# Altium PCB bob_breakout-layout.PcbDoc (part 1 of 2)
Units mil, origin at the board's own origin, x right, y up, seen from the top; angles counter-clockwise.
Board outline 5510 x 3935 mil, 2 copper layers (Top Layer, Bottom Layer); 95 components, 85 nets, 372 pads, 74 vias.
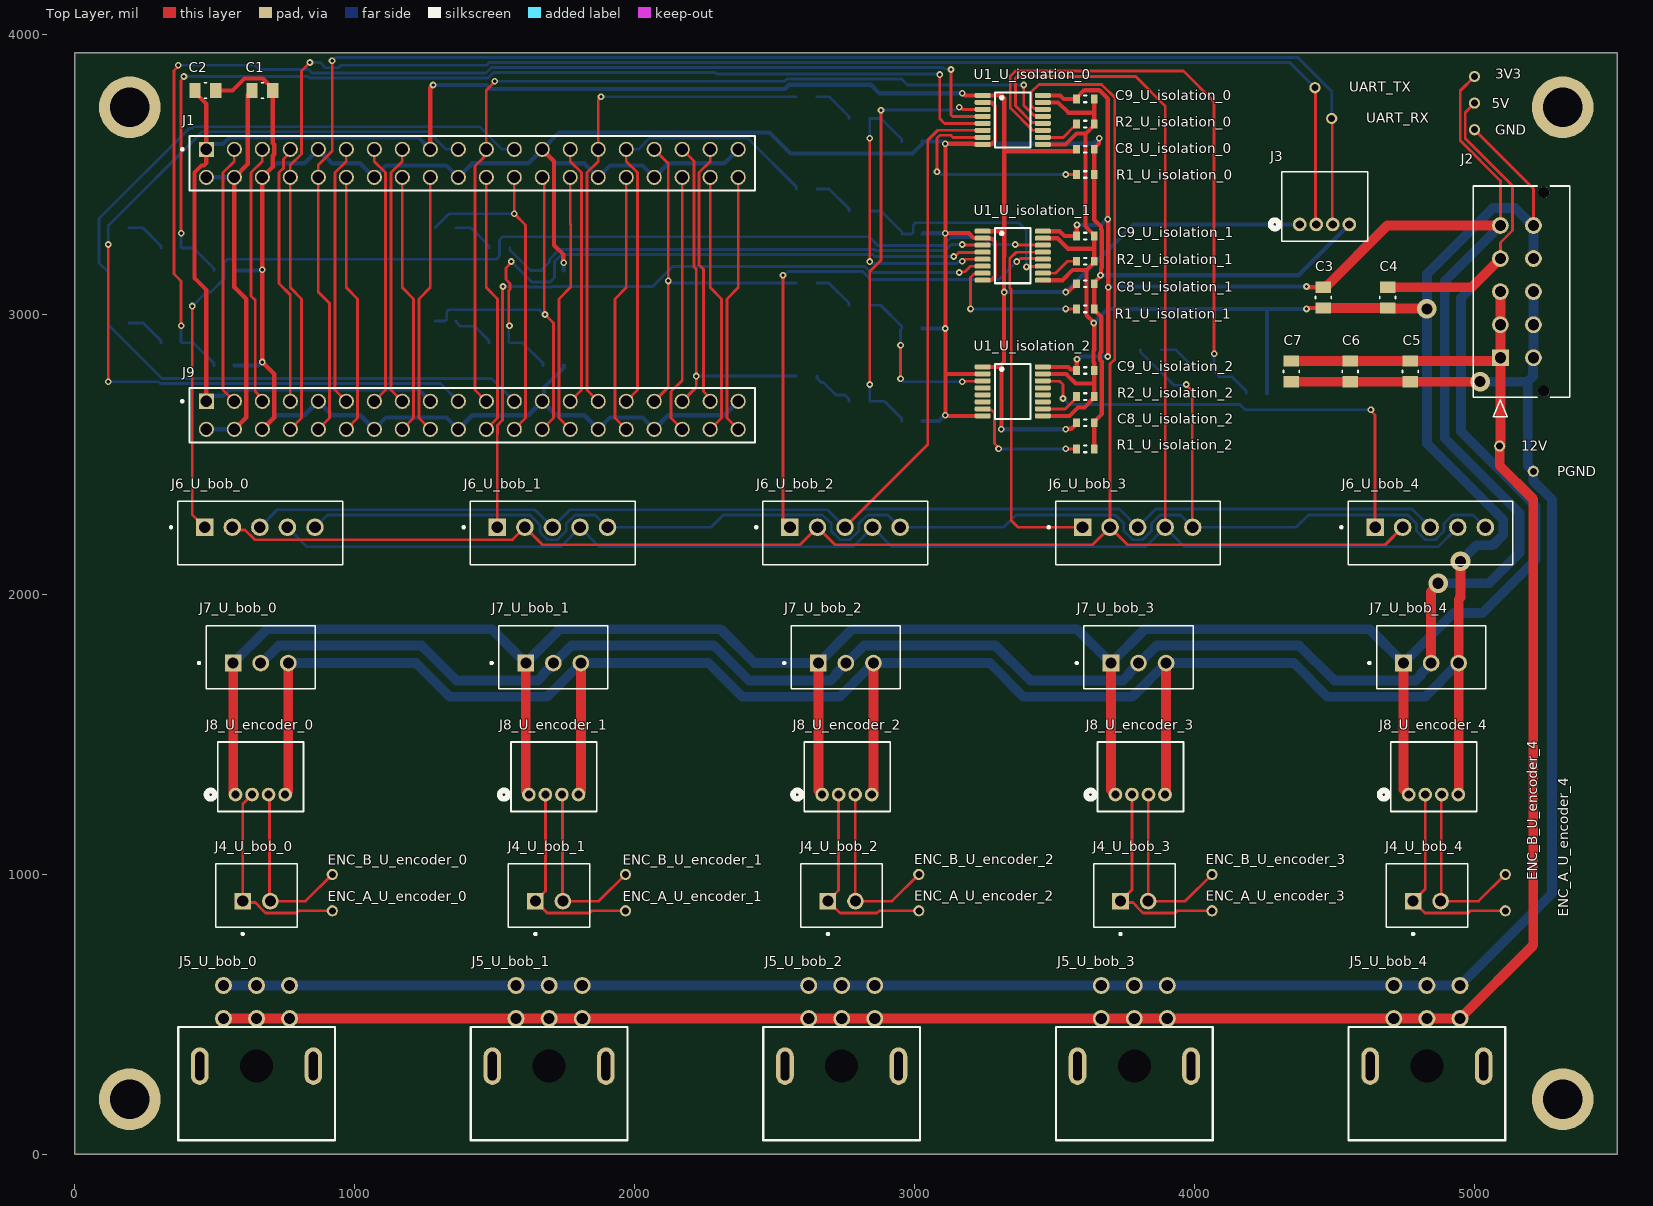
[diagram p0: Top Layer view]
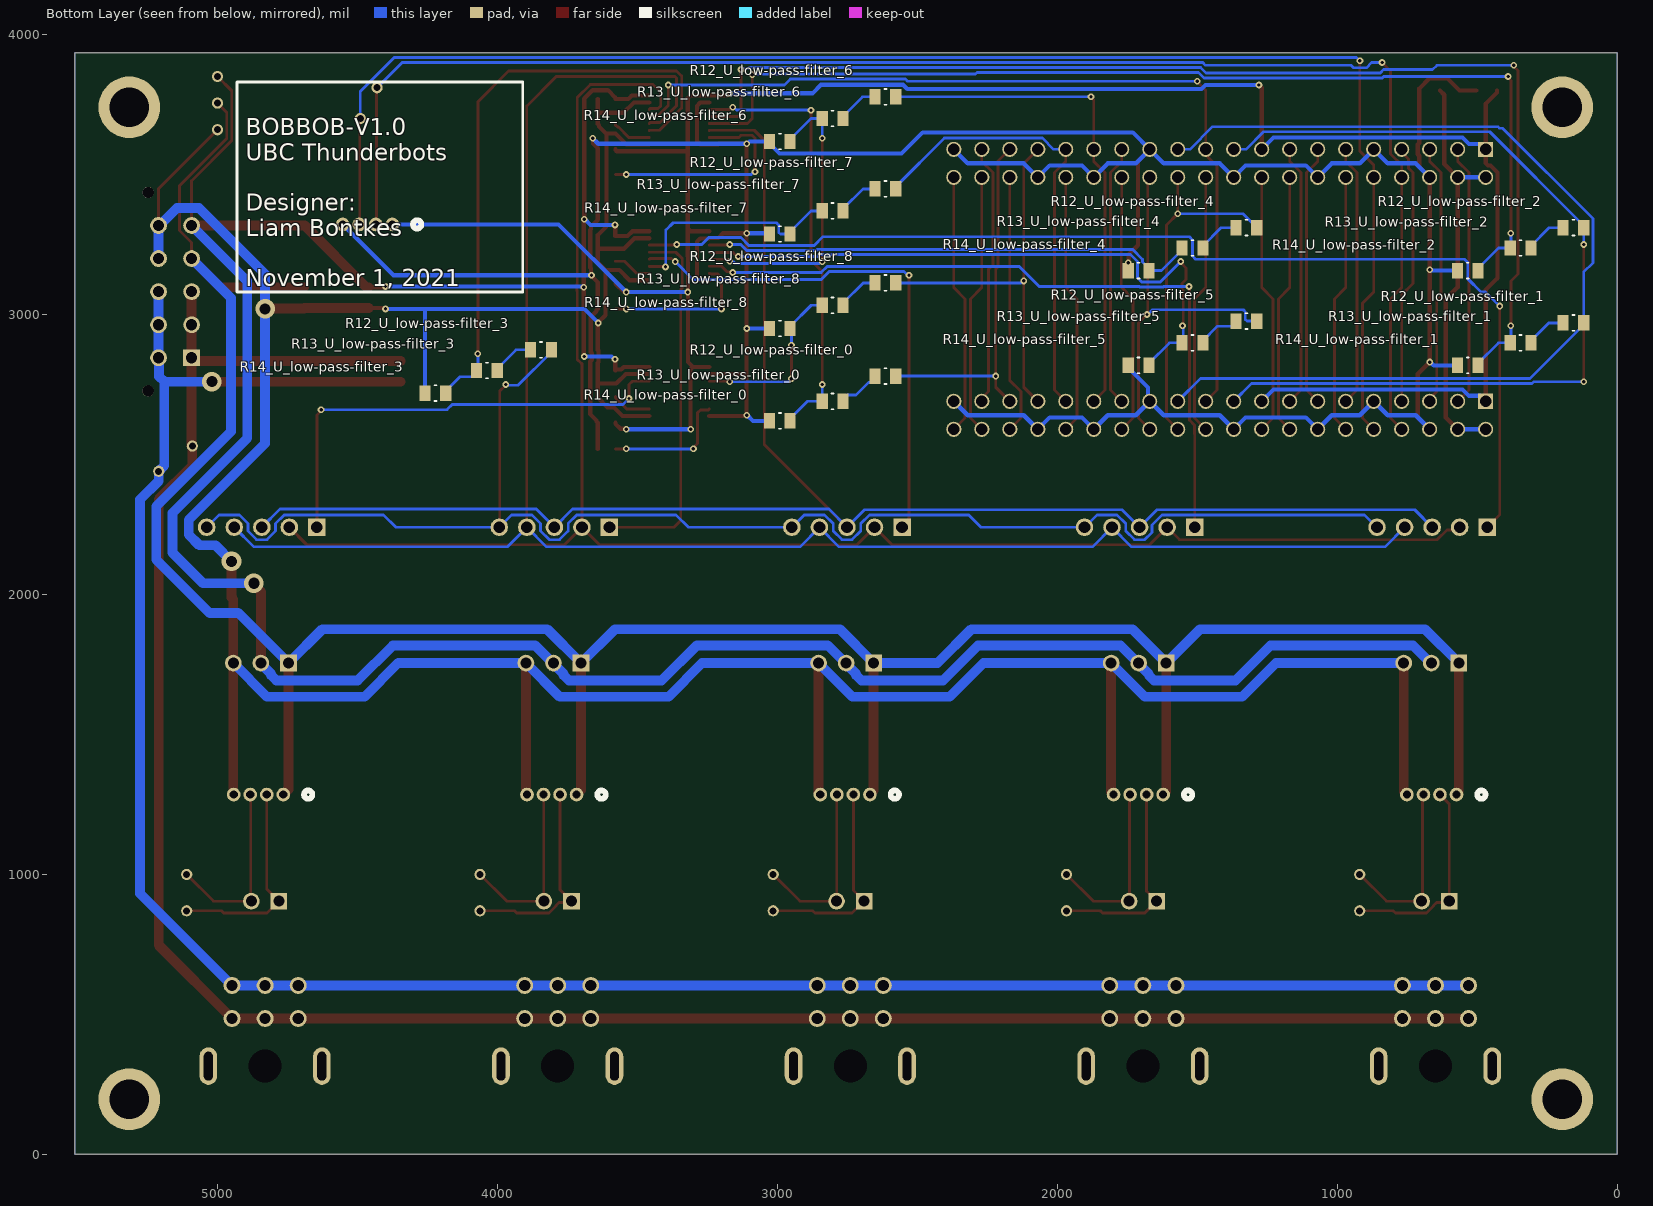
[diagram p1: Bottom Layer view, seen from below]

## Layer stack, top to bottom
Top Solder: solder mask 0.4, Solder Resist, Dk 3.5
Top Layer: signal copper 1.4
Dielectric 1: dielectric 12.6, FR-4, Dk 4.8
Bottom Layer: signal copper 1.4
Bottom Solder: solder mask 0.4, Solder Resist, Dk 3.5

## Board outline
0,0 5510,0 5510,3935 0,3935

## Design rules (kind name [scope] priority, off if disabled: settings)
BoardOutlineClearance [All] p1: gap=7.87 ignorepadtopadclearanceinfootprint=FALSE except(15.75: Arc-SplitBarrior Arc-SplitContinuation Track-SplitBarrior Track-SplitContinuation SMDPad-SplitBarrior SMDPad-SplitContinuation THPad-SplitBarrior THPad-SplitContinuation Via-SplitBarrior Via-SplitContinuation Fill-SplitBarrior Fill-SplitContinuation Poly-SplitBarrior Poly-SplitContinuation Region-SplitBarrior Region-SplitContinuation Text-SplitBarrior Text-SplitContinuation)
Clearance "Clearance Bottom Layer" [OnLayer('Bottom Layer')] p1: gap=8 ignorepadtopadclearanceinfootprint=TRUE except(10: Arc-Text Track-Text SMDPad-Text THPad-Text Via-Text Fill-Text Poly-Text Region-Text Text-Text)
Clearance "Clearance Top Layer" [OnLayer('Top Layer')] p2: gap=8 ignorepadtopadclearanceinfootprint=TRUE except(10: Arc-Text Track-Text SMDPad-Text THPad-Text Via-Text Fill-Text Poly-Text Region-Text Text-Text)
Clearance [All] p3: gap=7.87 ignorepadtopadclearanceinfootprint=TRUE except(3.5: Arc-Arc Arc-Track Arc-SMDPad Track-Track Track-SMDPad SMDPad-SMDPad; 5: Arc-Via Track-Via SMDPad-Via THPad-Via Via-Via; 10: Arc-Text Track-Text SMDPad-Text THPad-Text Via-Text Fill-Text Poly-Text Region-Text Text-Text)
HoleSize [All] p1: absolutevalues=TRUE maxlimit=248.03 minlimit=7.87 maxpercent=80.000 minpercent=20.000
MinimumAnnularRing [All] p1: minimumring=3
MinimumSolderMaskSliver [All] p1: minsoldermaskwidth=3.94
PolygonConnect PolygonConnect_1 [All] p1: thpad.connectstyle=Relief thpad.reliefconductorwidth=20 thpad.reliefentries=4 thpad.polygonreliefangle="90 Angle" thpad.airgapwidth=10 smdpad.connectstyle=Relief smdpad.reliefconductorwidth=20 smdpad.reliefentries=4 smdpad.polygonreliefangle="90 Angle" smdpad.airgapwidth=10 via.connectstyle=Direct via.reliefconductorwidth=20 via.reliefentries=4 via.polygonreliefangle="90 Angle" via.airgapwidth=10
RoomDefinition U_low-pass-filter_8 [InComponentClass('U_low-pass-filter_8')] p1: confinementstyle=ConfineIn formatcopy=TRUE lockcomponents=FALSE outline 2530,2900 3070,2900 3070,3170 2530,3170
RoomDefinition U_low-pass-filter_7 [InComponentClass('U_low-pass-filter_7')] p2: confinementstyle=ConfineIn formatcopy=TRUE lockcomponents=FALSE outline 2530,3240 3070,3240 3070,3500 2530,3500
RoomDefinition U_low-pass-filter_6 [InComponentClass('U_low-pass-filter_6')] p3: confinementstyle=ConfineIn formatcopy=TRUE lockcomponents=FALSE outline 2530,3570 3070,3570 3070,3830 2530,3830
RoomDefinition U_low-pass-filter_5 [InComponentClass('U_low-pass-filter_5')] p4: confinementstyle=ConfineIn formatcopy=TRUE lockcomponents=FALSE outline 1240,2770 1790,2770 1790,3030 1240,3030
RoomDefinition U_low-pass-filter_4 [InComponentClass('U_low-pass-filter_4')] p5: confinementstyle=ConfineIn formatcopy=TRUE lockcomponents=FALSE outline 1240,3100 1790,3100 1790,3360 1240,3360
RoomDefinition U_low-pass-filter_3 [InComponentClass('U_low-pass-filter_3')] p6: confinementstyle=ConfineIn formatcopy=TRUE lockcomponents=FALSE outline 3760,2670 4300,2670 4300,2930 3760,2930
RoomDefinition U_low-pass-filter_2 [InComponentClass('U_low-pass-filter_2')] p7: confinementstyle=ConfineIn formatcopy=TRUE lockcomponents=FALSE outline 70,3100 620,3100 620,3360 70,3360
RoomDefinition U_low-pass-filter_1 [InComponentClass('U_low-pass-filter_1')] p8: confinementstyle=ConfineIn formatcopy=TRUE lockcomponents=FALSE outline 70,2770 620,2770 620,3020 70,3020
RoomDefinition U_low-pass-filter_0 [InComponentClass('U_low-pass-filter_0')] p9: confinementstyle=ConfineIn formatcopy=TRUE lockcomponents=FALSE outline 2530,2570 3070,2570 3070,2830 2530,2830
RoomDefinition U_isolation_0 [InComponentClass('U_isolation_0')] p10: confinementstyle=ConfineIn formatcopy=TRUE lockcomponents=FALSE outline 3190,3460 3670,3460 3670,3820 3190,3820
RoomDefinition U_ui [InComponentClass('U_ui')] p11: confinementstyle=ConfineIn formatcopy=TRUE lockcomponents=FALSE outline 366.5,2521.73 366.5,2758.27 2450.87,2758.27 2450.87,2521.73
RoomDefinition U_power [InComponentClass('U_power')] p12: confinementstyle=ConfineIn formatcopy=TRUE lockcomponents=FALSE outline 4250,2400 5410,2400 5410,3890 4250,3890
RoomDefinition U_jetson-nano [InComponentClass('U_jetson-nano')] p13: confinementstyle=ConfineIn formatcopy=TRUE lockcomponents=FALSE outline 360,3420 2460,3420 2460,3850 360,3850
RoomDefinition U_isolation_2 [InComponentClass('U_isolation_2')] p14: confinementstyle=ConfineIn formatcopy=TRUE lockcomponents=FALSE outline 3190,2480 3670,2480 3670,2850 3190,2850
RoomDefinition U_isolation_1 [InComponentClass('U_isolation_1')] p15: confinementstyle=ConfineIn formatcopy=TRUE lockcomponents=FALSE outline 3190,2980 3670,2980 3670,3340 3190,3340
RoomDefinition U_encoder_4 [InComponentClass('U_encoder_4')] p16: confinementstyle=ConfineIn formatcopy=TRUE lockcomponents=FALSE outline 4640,830 5150,830 5150,1500 4640,1500
RoomDefinition U_encoder_3 [InComponentClass('U_encoder_3')] p17: confinementstyle=ConfineIn formatcopy=TRUE lockcomponents=FALSE outline 3590,830 4100,830 4100,1500 3590,1500
RoomDefinition U_encoder_2 [InComponentClass('U_encoder_2')] p18: confinementstyle=ConfineIn formatcopy=TRUE lockcomponents=FALSE outline 2540,830 3050,830 3050,1500 2540,1500
RoomDefinition U_encoder_1 [InComponentClass('U_encoder_1')] p19: confinementstyle=ConfineIn formatcopy=TRUE lockcomponents=FALSE outline 1490,830 2010,830 2010,1500 1490,1500
RoomDefinition U_encoder_0 [InComponentClass('U_encoder_0')] p20: confinementstyle=ConfineIn formatcopy=TRUE lockcomponents=FALSE outline 450,830 960,830 960,1500 450,1500
RoomDefinition U_bob_4 [InComponentClass('U_bob_4')] p21: confinementstyle=ConfineIn formatcopy=TRUE lockcomponents=FALSE outline 4500,30 5160,30 5160,2360 4500,2360
RoomDefinition U_bob_3 [InComponentClass('U_bob_3')] p22: confinementstyle=ConfineIn formatcopy=TRUE lockcomponents=FALSE outline 3460,30 4120,30 4120,2360 3460,2360
RoomDefinition U_bob_2 [InComponentClass('U_bob_2')] p23: confinementstyle=ConfineIn formatcopy=TRUE lockcomponents=FALSE outline 2410,30 3070,30 3070,2360 2410,2360
RoomDefinition U_bob_1 [InComponentClass('U_bob_1')] p24: confinementstyle=ConfineIn formatcopy=TRUE lockcomponents=FALSE outline 1370,30 2030,30 2030,2360 1370,2360
RoomDefinition U_bob_0 [InComponentClass('U_bob_0')] p25: confinementstyle=ConfineIn formatcopy=TRUE lockcomponents=FALSE outline 320,30 980,30 980,2360 320,2360
RoutingCorners [All] p1: cornerstyle=Round minsetback=100 maxsetback=100
RoutingVias [All] p1: holewidth=19.68 width=39.37 viastyle="Through Hole" minholewidth=7.87 minwidth=17.72 maxholewidth=39.37 maxwidth=78.74
SilkToSilkClearance [All] p1: silktosilkclearance=3.94
SilkToSolderMaskClearance [IsPad] p1: minsilkscreentomaskgap=3.94 clearancetoexposedcopper=TRUE
SolderMaskExpansion [All] p1: expansion=4 istentingtop=FALSE
Width [All] p1: maxlimit=100 minlimit=3.5 preferedwidth=15
25 further rules are at their usual default settings.

## Classes and differential pairs
channel class low-pass-filter: U_low-pass-filter_0 U_low-pass-filter_1 U_low-pass-filter_2 U_low-pass-filter_3 U_low-pass-filter_4 U_low-pass-filter_5 U_low-pass-filter_6 U_low-pass-filter_7 U_low-pass-filter_8
component class U_low-pass-filter_8: R12_U_low-pass-filter_8 R13_U_low-pass-filter_8 R14_U_low-pass-filter_8
component class U_low-pass-filter_7: R12_U_low-pass-filter_7 R13_U_low-pass-filter_7 R14_U_low-pass-filter_7
component class U_low-pass-filter_6: R12_U_low-pass-filter_6 R13_U_low-pass-filter_6 R14_U_low-pass-filter_6
component class U_low-pass-filter_5: R12_U_low-pass-filter_5 R13_U_low-pass-filter_5 R14_U_low-pass-filter_5
component class U_low-pass-filter_4: R12_U_low-pass-filter_4 R13_U_low-pass-filter_4 R14_U_low-pass-filter_4
component class U_low-pass-filter_3: R12_U_low-pass-filter_3 R13_U_low-pass-filter_3 R14_U_low-pass-filter_3
component class U_low-pass-filter_2: R12_U_low-pass-filter_2 R13_U_low-pass-filter_2 R14_U_low-pass-filter_2
component class U_low-pass-filter_1: R12_U_low-pass-filter_1 R13_U_low-pass-filter_1 R14_U_low-pass-filter_1
component class U_low-pass-filter_0: R12_U_low-pass-filter_0 R13_U_low-pass-filter_0 R14_U_low-pass-filter_0
component class U_isolation_2: C8_U_isolation_2 C9_U_isolation_2 R1_U_isolation_2 R2_U_isolation_2 U1_U_isolation_2
component class U_isolation_1: C8_U_isolation_1 C9_U_isolation_1 R1_U_isolation_1 R2_U_isolation_1 U1_U_isolation_1
component class U_isolation_0: C8_U_isolation_0 C9_U_isolation_0 R1_U_isolation_0 R2_U_isolation_0 U1_U_isolation_0
component class U_encoder_4: ENC_A_U_encoder_4 ENC_B_U_encoder_4 J8_U_encoder_4
component class U_bob_0: J4_U_bob_0 J5_U_bob_0 J6_U_bob_0 J7_U_bob_0
channel class isolation: U_isolation1 U_isolation2 U_isolation3
channel class encoder: U_encoder1 U_encoder_0 U_encoder_1 U_encoder_2 U_encoder_3
channel class bob: U_bob5 U_bob_1 U_bob_2 U_bob_3 U_bob_4
component class U_ui: J9
component class U_power: 3V3 5V 12V C3 C4 C5 C6 C7 GND J2 J3 PGND UART_RX UART_TX
component class U_jetson-nano: C1 C2 J1
component class U_encoder_0: ENC_A_U_encoder_0 ENC_B_U_encoder_0 J8_U_encoder_0
component class U_encoder_1: ENC_A_U_encoder_1 ENC_B_U_encoder_1 J8_U_encoder_1
component class U_encoder_2: ENC_A_U_encoder_2 ENC_B_U_encoder_2 J8_U_encoder_2
component class U_encoder_3: ENC_A_U_encoder_3 ENC_B_U_encoder_3 J8_U_encoder_3
component class U_bob_1: J4_U_bob_1 J5_U_bob_1 J6_U_bob_1 J7_U_bob_1
component class U_bob_2: J4_U_bob_2 J5_U_bob_2 J6_U_bob_2 J7_U_bob_2
component class U_bob_3: J4_U_bob_3 J5_U_bob_3 J6_U_bob_3 J7_U_bob_3
component class U_bob_4: J4_U_bob_4 J5_U_bob_4 J6_U_bob_4 J7_U_bob_4

## Components (designator, comment, footprint, x,y, rotation, side; value= is the part's Value field where it differs from the comment)
3V3 "Test Point (Via)" TP 5000,3850 r90 top
5V "Test Point (Via)" TP 5000,3755 r90 top
12V "Test Point (Via)" TP 5090,2530 r90 top
C1 "0.1uF 25V" 0805 670,3800 r0 top value=0.1uF
C2 "0.1uF 25V" 0805 467,3800 r0 top value=0.1uF
C3 "0.1uF 25V" 0805 4460,3060 r270 top value=0.1uF
C4 "0.1uF 25V" 0805 4690,3060 r270 top value=0.1uF
C5 "0.1uF 25V" 0805 4770.63,2796.74 r270 top value=0.1uF
C6 "0.1uF 25V" 0805 4555.63,2796.74 r270 top value=0.1uF
C7 "0.1uF 25V" 0805 4345.63,2796.74 r270 top value=0.1uF
C8_U_isolation_0 "0.10uF" 0603 3610,3590 r180 top (schematic designator C8)
C8_U_isolation_1 "0.10uF" 0603 3610,3110 r180 top (schematic designator C8)
C8_U_isolation_2 "0.10uF" 0603 3610,2613.33 r180 top (schematic designator C8)
C9_U_isolation_0 "0.10uF" 0603 3610,3770 r180 top (schematic designator C9)
C9_U_isolation_1 "0.10uF" 0603 3610,3280 r180 top (schematic designator C9)
C9_U_isolation_2 "0.10uF" 0603 3610,2800 r180 top (schematic designator C9)
ENC_A_U_encoder_0 "Test Point (Via)" TP 920,870 r90 top (schematic designator ENC_A)
ENC_A_U_encoder_1 "Test Point (Via)" TP 1967.5,870 r90 top (schematic designator ENC_A)
ENC_A_U_encoder_2 "Test Point (Via)" TP 3015,870 r90 top (schematic designator ENC_A)
ENC_A_U_encoder_3 "Test Point (Via)" TP 4062.5,870 r90 top (schematic designator ENC_A)
ENC_A_U_encoder_4 "Test Point (Via)" TP 5110,870 r90 top (schematic designator ENC_A)
ENC_B_U_encoder_0 "Test Point (Via)" TP 920,1000 r90 top (schematic designator ENC_B)
ENC_B_U_encoder_1 "Test Point (Via)" TP 1967.5,1000 r90 top (schematic designator ENC_B)
ENC_B_U_encoder_2 "Test Point (Via)" TP 3015,1000 r90 top (schematic designator ENC_B)
ENC_B_U_encoder_3 "Test Point (Via)" TP 4062.5,1000 r90 top (schematic designator ENC_B)
ENC_B_U_encoder_4 "Test Point (Via)" TP 5110,1000 r90 top (schematic designator ENC_B)
GND "Test Point (Via)" TP 5000,3660 r90 top
J1 "CN HDR 40POS TH" SAMTEC_SSQ-120-22-G-D 1420,3540 r180 top
J2 "8A Molex" MOLEX_0430451012 5092.52,2845.52 r270 top
J3 "S4B-ZR(LF)(SN)" "CN S4B-ZR(LF)(SN)_JST" 4375.63,3321.74 r180 top
J4_U_bob_0 "CN HDR 2POS JST XH" JST_B2B-XH-A(LF)(SN) 649.37,925 r0 top (schematic designator J4)
J4_U_bob_1 "CN HDR 2POS JST XH" JST_B2B-XH-A(LF)(SN) 1694.53,925 r0 top (schematic designator J4)
J4_U_bob_2 "CN HDR 2POS JST XH" JST_B2B-XH-A(LF)(SN) 2739.68,925 r0 top (schematic designator J4)
J4_U_bob_3 "CN HDR 2POS JST XH" JST_B2B-XH-A(LF)(SN) 3784.84,925 r0 top (schematic designator J4)
J4_U_bob_4 "CN HDR 2POS JST XH" JST_B2B-XH-A(LF)(SN) 4830,925 r0 top (schematic designator J4)
J5_U_bob_0 "CN HDR 6POS Molex 43045-0622 (R)" 430450622 649.37,315 r0 top (schematic designator J5)
J5_U_bob_1 "CN HDR 6POS Molex 43045-0622 (R)" 430450622 1694.53,315 r0 top (schematic designator J5)
J5_U_bob_2 "CN HDR 6POS Molex 43045-0622 (R)" 430450622 2739.68,315 r0 top (schematic designator J5)
J5_U_bob_3 "CN HDR 6POS Molex 43045-0622 (R)" 430450622 3784.84,315 r0 top (schematic designator J5)
J5_U_bob_4 "CN HDR 6POS Molex 43045-0622 (R)" 430450622 4830,315 r0 top (schematic designator J5)
J6_U_bob_0 "CN HDR 5POS JST XH" JST_B5B-XH-A(LF)(SN) 464.37,2240 r0 top (schematic designator J6)
J6_U_bob_1 "CN HDR 5POS JST XH" JST_B5B-XH-A(LF)(SN) 1509.53,2240 r0 top (schematic designator J6)
J6_U_bob_2 "CN HDR 5POS JST XH" JST_B5B-XH-A(LF)(SN) 2554.68,2240 r0 top (schematic designator J6)
J6_U_bob_3 "CN HDR 5POS JST XH" JST_B5B-XH-A(LF)(SN) 3599.84,2240 r0 top (schematic designator J6)
J6_U_bob_4 "CN HDR 5POS JST XH" JST_B5B-XH-A(LF)(SN) 4645,2240 r0 top (schematic designator J6)
J7_U_bob_0 "B3B-XH-A(LF)(SN)" JST_B3B-XH-A(LF)(SN) 664.37,1755 r0 top (schematic designator J7)
J7_U_bob_1 "B3B-XH-A(LF)(SN)" JST_B3B-XH-A(LF)(SN) 1709.53,1755 r0 top (schematic designator J7)
J7_U_bob_2 "B3B-XH-A(LF)(SN)" JST_B3B-XH-A(LF)(SN) 2754.68,1755 r0 top (schematic designator J7)
J7_U_bob_3 "B3B-XH-A(LF)(SN)" JST_B3B-XH-A(LF)(SN) 3799.84,1755 r0 top (schematic designator J7)
J7_U_bob_4 "B3B-XH-A(LF)(SN)" JST_B3B-XH-A(LF)(SN) 4845,1755 r0 top (schematic designator J7)
J8_U_encoder_0 "S4B-ZR(LF)(SN)" "CN S4B-ZR(LF)(SN)_JST" 574.37,1285 r180 top (schematic designator J8)
J8_U_encoder_1 "S4B-ZR(LF)(SN)" "CN S4B-ZR(LF)(SN)_JST" 1622.03,1285 r180 top (schematic designator J8)
J8_U_encoder_2 "S4B-ZR(LF)(SN)" "CN S4B-ZR(LF)(SN)_JST" 2669.68,1285 r180 top (schematic designator J8)
J8_U_encoder_3 "S4B-ZR(LF)(SN)" "CN S4B-ZR(LF)(SN)_JST" 3717.34,1285 r180 top (schematic designator J8)
J8_U_encoder_4 "S4B-ZR(LF)(SN)" "CN S4B-ZR(LF)(SN)_JST" 4765,1285 r180 top (schematic designator J8)
J9 "CN HDR 40POS TH" SAMTEC_SSQ-120-22-G-D 1420,2640 r180 top
PGND "Test Point (Via)" TP 5210,2440 r90 top
R1_U_isolation_0 "4.7k" 0603 3610,3500 r0 top (schematic designator R1)
R1_U_isolation_1 "4.7k" 0603 3610,3020 r0 top (schematic designator R1)
R1_U_isolation_2 "4.7k" 0603 3610,2520 r0 top (schematic designator R1)
R2_U_isolation_0 "4.7k" 0603 3610,3680 r0 top (schematic designator R2)
R2_U_isolation_1 "4.7k" 0603 3610,3190 r0 top (schematic designator R2)
R2_U_isolation_2 "4.7k" 0603 3610,2706.67 r0 top (schematic designator R2)
R12_U_low-pass-filter_0 "22" 0805 2614.5,2780 r180 bottom (schematic designator R12)
R12_U_low-pass-filter_1 "22" 0805 157,2970 r180 bottom (schematic designator R12)
R12_U_low-pass-filter_2 "22" 0805 157,3310 r180 bottom (schematic designator R12)
R12_U_low-pass-filter_3 "22" 0805 3844.5,2873.75 r180 bottom (schematic designator R12)
R12_U_low-pass-filter_4 "22" 0805 1324.5,3310 r180 bottom (schematic designator R12)
R12_U_low-pass-filter_5 "22" 0805 1324.5,2976.25 r180 bottom (schematic designator R12)
R12_U_low-pass-filter_6 "22" 0805 2614.5,3777.5 r180 bottom (schematic designator R12)
R12_U_low-pass-filter_7 "22" 0805 2614.5,3448.75 r180 bottom (schematic designator R12)
R12_U_low-pass-filter_8 "22" 0805 2614.5,3113 r180 bottom (schematic designator R12)
R13_U_low-pass-filter_0 "JUMPER" 0805 2803,2690 r180 bottom value=0 (schematic designator R13)
R13_U_low-pass-filter_1 "JUMPER" 0805 345.5,2898.75 r180 bottom value=0 (schematic designator R13)
R13_U_low-pass-filter_2 "JUMPER" 0805 345.5,3237.5 r180 bottom value=0 (schematic designator R13)
R13_U_low-pass-filter_3 "JUMPER" 0805 4037.5,2800 r180 bottom value=0 (schematic designator R13)
R13_U_low-pass-filter_4 "JUMPER" 0805 1517.25,3237.5 r180 bottom value=0 (schematic designator R13)
R13_U_low-pass-filter_5 "JUMPER" 0805 1517.25,2898.75 r180 bottom value=0 (schematic designator R13)
R13_U_low-pass-filter_6 "JUMPER" 0805 2803,3700 r180 bottom value=0 (schematic designator R13)
R13_U_low-pass-filter_7 "JUMPER" 0805 2803,3370 r180 bottom value=0 (schematic designator R13)
R13_U_low-pass-filter_8 "JUMPER" 0805 2803,3033 r180 bottom value=0 (schematic designator R13)
R14_U_low-pass-filter_0 "JUMPER" 0805 2991.5,2620 r0 bottom value=0 (schematic designator R14)
R14_U_low-pass-filter_1 "JUMPER" 0805 534,2818.12 r0 bottom value=0 (schematic designator R14)
R14_U_low-pass-filter_2 "JUMPER" 0805 534,3156.75 r0 bottom value=0 (schematic designator R14)
R14_U_low-pass-filter_3 "JUMPER" 0805 4221.5,2718.88 r0 bottom value=0 (schematic designator R14)
R14_U_low-pass-filter_4 "JUMPER" 0805 1710,3156.75 r0 bottom value=0 (schematic designator R14)
R14_U_low-pass-filter_5 "JUMPER" 0805 1710,2818.12 r0 bottom value=0 (schematic designator R14)
R14_U_low-pass-filter_6 "JUMPER" 0805 2991.5,3617.75 r0 bottom value=0 (schematic designator R14)
R14_U_low-pass-filter_7 "JUMPER" 0805 2991.5,3287.38 r0 bottom value=0 (schematic designator R14)
R14_U_low-pass-filter_8 "JUMPER" 0805 2991.5,2950 r0 bottom value=0 (schematic designator R14)
U1_U_isolation_0 "ADUM141D1BRQZ" SOP64P600X175-16N 3350.63,3695 r0 top (schematic designator U1)
U1_U_isolation_1 "ADUM141D1BRQZ" SOP64P600X175-16N 3350.63,3210 r0 top (schematic designator U1)
U1_U_isolation_2 "ADUM141D1BRQZ" SOP64P600X175-16N 3350.63,2725 r0 top (schematic designator U1)
UART_RX "Test Point (Via)" TP 4490,3700 r90 top
UART_TX "Test Point (Via)" TP 4430,3810 r180 top

## Footprints (in the part's own frame and the unit in brackets; to place one, negate y for a bottom-side part, rotate by r counter-clockwise, add the part's x,y. Pads: shape width x height; smd on the part's side, far side on the other; paste and mask are expansions set on the pad)
0603 [mm] "Chip Resistor, 2-Leads, Body 1.60x0.80mm, IPC High Density"
  rect 0.6x0.8 smd: 1(-0.8,0) 2(0.8,0)
  silkscreen extent -0.1,-0.3 0.1,0.3, body extent -0.8,-0.4 0.8,0.4, height 0.6
0805 [mil]
  rect 40x55 smd: 1(-37,0) 2(37,0)
  silkscreen extent -4,-28 4,28, body extent -47,-28 47,28, height 24
430450622 [mm] "6 POS RA MOLEX"
  round 1.53 hole 1.02: 1(3,4.32) 2(0,4.32) 3(-3,4.32) 4(3,7.32) 5(0,7.32) 6(-3,7.32)
  round 0 hole 3: MH(0,0)
  oval 1.6x3.4 hole 0.8 slot 2.6 at 90 deg: MH1(5.15,0) MH2(-5.15,0)
  silkscreen extent -7.11,-6.71 7.11,3.56, body extent -6.62,-4.65 6.58,7.59, height 3.12
"CN S4B-ZR(LF)(SN)_JST" [mil]
  round 49 hole 29 mask+0: 1(0,0) 2(-59.06,0) 3(-118.11,0) 4(-177.17,0)
  silkscreen extent -243,-188 104,60, body extent 0,0 10,10, height 10
JST_B2B-XH-A(LF)(SN) [mm]
  rect 1.508x1.508 hole 1: 1(-1.25,-0.525)
  round 1.508 hole 1: 2(1.25,-0.525)
  silkscreen extent -3.7,-3.6 3.7,2.88, body extent -3.7,-2.85 3.7,2.9, height 7.1
JST_B3B-XH-A(LF)(SN) [mm]
  rect 1.508x1.508 hole 1: 1(-2.5,0)
  round 1.508 hole 1: 2(0,0) 3(2.5,0)
  silkscreen extent -5.7,-2.35 4.95,3.4, body extent -4.96,-2.35 4.94,3.4, height 7
JST_B5B-XH-A(LF)(SN) [mm]
  rect 1.59x1.59 hole 1.06: 1(0,0)
  round 1.59 hole 1.06: 2(2.5,0) 3(5,0) 4(7.5,0) 5(10,0)
  silkscreen extent -3.16,-3.4 12.5,2.35
MOLEX_0430451012 [mm]
  rect 1.52x1.52 hole 1.02 mask+0.076: 1(0,0)
  round 1.52 hole 1.02 mask+0.076: 2(-3,0) 3(-6,0) 4(-9,0) 5(-12,0) 6(0,3) 7(-3,3) 8(-6,3) 9(-9,3) 10(-12,3)
  round 1.02 hole 1.02 unplated mask+0.076: M1(3,3.94) M2(-15,3.94)
  silkscreen extent -15.57,-2.47 5.35,6.3, body extent -15.57,-2.47 3.58,6.3, height 9.95
SAMTEC_SSQ-120-22-G-D [mm]
  rect 1.37x1.37 hole 1.02: 01(24.13,-1.27)
  round 1.37 hole 1.02: 02(24.13,1.27) 03(21.59,-1.27) 04(21.59,1.27) 05(19.05,-1.27) 06(19.05,1.27) 07(16.51,-1.27) 08(16.51,1.27) 09(13.97,-1.27) 10(13.97,1.27) 11(11.43,-1.27) 12(11.43,1.27) 13(8.89,-1.27) 14(8.89,1.27) 15(6.35,-1.27) 16(6.35,1.27) 17(3.81,-1.27) 18(3.81,1.27) 19(1.27,-1.27) 20(1.27,1.27) 21(-1.27,-1.27) 22(-1.27,1.27) 23(-3.81,-1.27) 24(-3.81,1.27) 25(-6.35,-1.27) 26(-6.35,1.27) 27(-8.89,-1.27) 28(-8.89,1.27) 29(-11.43,-1.27) 30(-11.43,1.27) 31(-13.97,-1.27) 32(-13.97,1.27) 33(-16.51,-1.27) 34(-16.51,1.27) 35(-19.05,-1.27) 36(-19.05,1.27) 37(-21.59,-1.27) 38(-21.59,1.27) 39(-24.13,-1.27) 40(-24.13,1.27)
  silkscreen extent -25.66,-2.47 26.4,2.47
SOP64P600X175-16N [mm] "SOP, 16-Leads, Body 4.90x3.91mm, Pitch 0.64mm, IPC Medium Density"
  rrect50% 1.45x0.45 smd mask+0.08: 1(-2.725,2.222) 2(-2.725,1.587) 3(-2.725,0.953) 4(-2.725,0.318) 5(-2.725,-0.318) 6(-2.725,-0.953) 7(-2.725,-1.587) 8(-2.725,-2.222) 9(2.725,-2.222) 10(2.725,-1.587) 11(2.725,-0.953) 12(2.725,-0.318) 13(2.725,0.318) 14(2.725,0.953) 15(2.725,1.587) 16(2.725,2.222)
  silkscreen extent -1.6,-2.5 1.6,2.5, body extent -2,-2.5 2,2.5, height 1.76
TP [mil] "Test point (40mil Standard)"
  round 40 hole 25: 1(0,0)

## Part data
C1 C2 C3 C4 C5 C6 C7: library part "CAP 0.1uF 25V", "CAP CER 0.1UF 25V X7R 0805/0603", Operating Temperature="-55°C ~ 125°C", Rating=25V, Temperature Coefficient=X7R, Tolerance=10%
C8_U_isolation_0 C8_U_isolation_1 C8_U_isolation_2 C9_U_isolation_0 C9_U_isolation_1 C9_U_isolation_2: library part "CAP 0.10uF 35V", "CAP CER 0.10UF 35V X7R 0603/0805", Operating Temperature="-55°C ~ 125°C", Package=0603/0805, Rating=35V, Temperature Coefficient=X7R, Tolerance=10%
J1 J9: "SSQ - Samtec 2.54mm Square Tail Dual Row Socket Strip 8.5mm Profile", Package=None, Availability="In Stock", Check_prices=https://www.snapeda.com/parts/SSQ-120-22-G-D/Samtec/view-part/3393219/?ref=eda, Digikey=S6104-ND, MF=Samtec, MP=SSQ-120-22-G-D, Price=None, Purchase-URL=https://pricing.snapeda.com/search/part/SSQ-120-22-G-D/?ref=eda, SnapEDA_Link=https://www.snapeda.com/parts/SSQ-120-22-G-D/Samtec/view-part/3393219/?ref=snap
J2: library part "CN HDR 10POS MOLEX 0430451012", "CONN HEADER VERT 10POS 3MM", Color=Black, Contact Resistance=10mR, Flammability Rating="UL94 V-0", Manufacturer=Molex, Manufacturer Part Number=0430451012, Max Operating Temperature=105°C, Max Voltage Rating (AC)=250V, Min Operating Temperature=-40°C, Supplier Part Number 1=WM1793-ND, Category="Headers and Wire Housings", ComponentLink1Description=http://components.arrow.com/part/dataview/0323_01052363?src-supplier=Arrow+Europe, ComponentLink1URL=http://components.arrow.com/part/dataview/0323_01052363?src-supplier=Arrow+Europe, ComponentLink2Description=http://components.arrow.com/part/dataview/2943140S3689940N3303?src-supplier=Arrow+Electronics, ComponentLink2URL=http://components.arrow.com/part/dataview/2943140S3689940N3303?src-supplier=Arrow+Electronics, Connector Type="Male Pin", Contact Material=Brass, Contact Plating=Tin, Contact Type="Male Pin", Depth=8.77mm, Fastening Type=Ramp, Housing Color=Black, Housing Material=Polymer, Length=19.15mm, Mount="Through Hole", Number of Contacts=10, Number of Ports=1, Number of Positions=10, Number of Rows=2, Number of Terminals/Pins=10, Orientation=Straight, Packaging=Tray, Pitch=0.118inch, Pricing 1="1=2.46000, 10=2.09300, 80=1.72925, 1224=1.36521, 6120=1.21049 (USD)", RoHS=Yes, RoHS Compliant=Yes, Row Spacing=0.118inch, Series="Micro-Fit 3.0™ 43045", Stock 1=22123, Supplier 1=Digi-Key, Termination=Solder
J3 J8_U_encoder_0 J8_U_encoder_1 J8_U_encoder_2 J8_U_encoder_3 J8_U_encoder_4: library part "CN HDR 4POS JST ZR", "Connector Header Through Hole, Right Angle 4 position 0.059\" (1.50mm)", Mfr_Name=JST, Supplier Part Number 1=455-1671-ND, Copyright="Copyright (C) 2021 Ultra Librarian. All rights reserved.", Digi-Key_Part_Number_1=455-1671-ND, Manufacturer_Part_Number=S4B-ZR(LF)(SN), RefDes=RefDes, Supplier 1=Digi-Key, Type=DEV
J4_U_bob_0 J4_U_bob_1 J4_U_bob_2 J4_U_bob_3 J4_U_bob_4: "Connector Header Through Hole 2 position 0.098 _2.50mm_ / JST XH", Package=None, Availability=Unavailable, MF="JST Sales", MP=B2B-XH-A_LF__SN_, Price=None, SnapEDA_Link=https://www.snapeda.com/parts/B2B-XH-A%28LF%29%28SN%29/JST%20Sales%20America%20Inc./view-part/492310/?ref=snap
J5_U_bob_0 J5_U_bob_1 J5_U_bob_2 J5_U_bob_3 J5_U_bob_4: "Molex 43045-0622 6POS Microfit / dual row, right angle"
J6_U_bob_0 J6_U_bob_1 J6_U_bob_2 J6_U_bob_3 J6_U_bob_4: "Connector Header Through Hole 5 position 0.098\" (2.50mm)", Package=None, Availability=Unavailable, ComponentLink1Description=Digikey, ComponentLink1URL=https://www.digikey.ca/en/products/detail/jst-sales-america-inc/B5B-XH-A-LF-SN/1530483, Digikey=455-2270-ND, MF="JST Sales", MP=B5B-XH-A(LF)(SN), Price=None
J7_U_bob_0 J7_U_bob_1 J7_U_bob_2 J7_U_bob_3 J7_U_bob_4: library part "CN 3POS TH JSTXH", "CN 3POS TH JST XH", Package=None, Availability=Warning, DigiKey-Purchase-URL=https://snapeda.com/shop?store=DigiKey&id=231271, MF="JST Sales", MP=B3B-XH-A(LF)(SN), Price=None, SnapEDA_Link=https://www.snapeda.com/parts/B3B-XH-A(LF)(SN)/JST%20Sales%20America%20Inc./view-part/231271/?ref=snap
R1_U_isolation_0 R1_U_isolation_1 R1_U_isolation_2 R2_U_isolation_0 R2_U_isolation_1 R2_U_isolation_2: library part "RES 4.7k 1/8W - 5%", "RES SMD 4.7k OHM 5% 1/8W 0805", Package=0805, Power (Watts)=0.125W, Tolerance=5%
R12_U_low-pass-filter_0 R12_U_low-pass-filter_1 R12_U_low-pass-filter_2 R12_U_low-pass-filter_3 R12_U_low-pass-filter_4 R12_U_low-pass-filter_5 R12_U_low-pass-filter_6 R12_U_low-pass-filter_7 R12_U_low-pass-filter_8: library part "RES 22.0 1/8W", "RES SMD 22 OHM 5% 1/8W 0805", Package=0805, Power (Watts)=0.125W, Tolerance=5%
R13_U_low-pass-filter_0 R13_U_low-pass-filter_1 R13_U_low-pass-filter_2 R13_U_low-pass-filter_3 R13_U_low-pass-filter_4 R13_U_low-pass-filter_5 R13_U_low-pass-filter_6 R13_U_low-pass-filter_7 R13_U_low-pass-filter_8 R14_U_low-pass-filter_0 R14_U_low-pass-filter_1 R14_U_low-pass-filter_2 R14_U_low-pass-filter_3 R14_U_low-pass-filter_4 R14_U_low-pass-filter_5 R14_U_low-pass-filter_6 R14_U_low-pass-filter_7 R14_U_low-pass-filter_8: library part "RES 0 JUMPER", "RES SMD 0 OHM JUMPER GENERIC 0805", Package=0805
U1_U_isolation_0 U1_U_isolation_1 U1_U_isolation_2: library part "ISO ADUM141D1BRQZ", "DGTL ISO 3.75KV 4CH SPI 16SSOP 3/1"

## Free pads (board coordinates)
  round 220.47 hole 141.73: ""(196.85,196.85) ""(196.85,3740.16) ""(5314.96,196.85) ""(5314.96,3740.16)

## Via types
v1: diameter 24, hole 12, Top Layer to Bottom Layer, 70 vias
v2: diameter 70, hole 39.37, Top Layer to Bottom Layer, 4 vias

## Nets (pads, with @x,y where several pads share a name; then routed paths per layer and width w, separated by ;. In a path a pad name is that pad's centre, name@x,y a point inside that pad or via, vN(x,y) a via of type N, cw(c..) or ccw(c..) an arc to the next point about the centre after c; other vN are vias at no path point)
3V3: 3V3.1 C3.1 C9_U_isolation_0.2 C9_U_isolation_1.2 C9_U_isolation_2.2 J2.5 J7_U_bob_0.2 J7_U_bob_1.2 J7_U_bob_2.2 J7_U_bob_3.2 J7_U_bob_4.2 U1_U_isolation_0.16 U1_U_isolation_1.16 U1_U_isolation_2.16 | length 10464.7
  Top Layer w10: 3V3.1@5000,3850 4949,3799 4949,3621 5092.52,3477.48 J2.5@5092.52,3317.96
  Top Layer w15: U1_U_isolation_2.16@3457.91,2812.5 3549.05,2812.5 3557.61,2803.94 C9_U_isolation_2.2@3578.5,2803.94 ; U1_U_isolation_1.16@3457.91,3297.5 3517.5,3297.5 3535,3280 C9_U_isolation_1.2@3578.5,3280 3579.25,3280.75 3579.25,3319.25 v1(3580,3320) ; U1_U_isolation_0.16@3457.91,3782.5 3520,3782.5 3532.5,3770 C9_U_isolation_0.2@3578.5,3770 3578.5,3773.94 3605.82,3801.25 3659.73,3801.25 3690,3770.98 v1(3690,3340) ; C9_U_isolation_2.2@3578.5,2800 3579.25,2800.75 3579.25,2839.25 v1(3580,2840) ; v1(3690,2850) 3691.72,2851.72 3691.72,2858.09 3691.81,2858.17 v1(3691.81,3096.96) 3691.81,3335.76 3691.72,3335.84 v1@3691.72,3337.56 ; v1(4400,3100) 4402.44,3100 4405.44,3097 C3.1@4460,3097
  Top Layer w35: C3.1@4460,3097 4467.5,3097 4688.46,3317.96 J2.5@5092.52,3317.96 ; J7_U_bob_4.2@4845,1755 4845,2009.59 4870,2034.59 v2(4870,2040)
  Bottom Layer w15: v1(3580,2840) 3582.44,2840 3592.44,2850 v1(3690,2850) ; v1(3580,3320) 3667.56,3320 3687.56,3340 v1(3690,3340) ; v1(3691.81,3096.96) 3694.84,3100 v1(4400,3100)
  Bottom Layer w35: J7_U_bob_0.2@664.37,1755 666.91,1755 729.59,1817.69 1238.41,1817.69 1363.78,1692.31 1654.46,1692.31 1673.79,1711.65 1673.79,1716.72 1709.53,1752.46 J7_U_bob_1.2@1709.53,1755 1712.06,1755 1774.75,1817.69 2283.57,1817.69 2408.94,1692.31 2699.61,1692.31 2718.94,1711.65 2718.94,1716.72 2754.68,1752.46 J7_U_bob_2.2@2754.68,1755 2757.22,1755 2819.91,1817.69 3288.21,1817.69 3413.58,1692.31 3744.77,1692.31 3764.1,1711.65 3764.1,1716.73 3799.84,1752.46 J7_U_bob_3.2@3799.84,1755 3802.38,1755 3865.06,1817.69 4373.88,1817.69 4499.25,1692.31 4789.93,1692.31 4809.26,1711.65 4809.26,1716.72 4845,1752.46 J7_U_bob_4.2@4845,1755 ; v2(4870,2040) 5052.02,2040 5161,2148.97 5161,2290.66 4894,2557.66 4894,3119.44 J2.5@5092.52,3317.96 J2.5@5092.63,3317.96
5V: 5V.1 C4.1 J2.4 J7_U_bob_0.1 J7_U_bob_1.1 J7_U_bob_2.1 J7_U_bob_3.1 J7_U_bob_4.1 J8_U_encoder_0.1 J8_U_encoder_1.1 J8_U_encoder_2.1 J8_U_encoder_3.1 J8_U_encoder_4.1 | length 9929.2
  Top Layer w10: 5V.1@5000,3755 4967,3722 4967,3628.46 5135.44,3460.01 5135.44,3300.18 5092.52,3257.26 J2.4@5092.52,3199.85
  Top Layer w35: J7_U_bob_0.1@565.95,1755 565.95,1293.42 J8_U_encoder_0.1@574.37,1285 ; J7_U_bob_1.1@1611.1,1755 1611.1,1295.93 J8_U_encoder_1.1@1622.03,1285 ; J7_U_bob_2.1@2656.26,1755 2656.26,1298.43 J8_U_encoder_2.1@2669.68,1285 ; J7_U_bob_3.1@3701.42,1755 3701.42,1300.92 J8_U_encoder_3.1@3717.34,1285 ; C4.1@4690,3097 4989.67,3097 J2.4@5092.52,3199.85 ; J7_U_bob_4.1@4746.57,1755 4746.57,1303.43 J8_U_encoder_4.1@4765,1285
  Bottom Layer w35: J7_U_bob_0.1@565.95,1755 686.63,1875.69 1490.42,1875.69 J7_U_bob_1.1@1611.1,1755 1731.79,1875.69 2307.59,1875.69 2428.27,1755 J7_U_bob_2.1@2656.26,1755 2776.94,1875.69 3580.73,1875.69 J7_U_bob_3.1@3701.42,1755 3822.1,1875.69 4625.89,1875.69 J7_U_bob_4.1@4746.57,1755 4925.57,1934 5028.05,1934 5219,2124.95 5219,2314.68 4952,2581.68 4952,3059.33 J2.4@5092.52,3199.85
12V: 12V.1 C5.1 C6.1 C7.1 J2.1 J2.2 J2.3 J5_U_bob_0.1 J5_U_bob_0.2 J5_U_bob_0.3 J5_U_bob_1.1 J5_U_bob_1.2 J5_U_bob_1.3 J5_U_bob_2.1 J5_U_bob_2.2 J5_U_bob_2.3 J5_U_bob_3.1 J5_U_bob_3.2 J5_U_bob_3.3 J5_U_bob_4.1 J5_U_bob_4.2 J5_U_bob_4.3 | length 7924.5
  Top Layer w35: J5_U_bob_0.3@531.26,485.08 J5_U_bob_0.2@649.37,485.08 J5_U_bob_0.1@767.48,485.08 J5_U_bob_1.3@1576.42,485.08 J5_U_bob_1.2@1694.53,485.08 J5_U_bob_1.1@1812.64,485.08 J5_U_bob_2.3@2621.57,485.08 J5_U_bob_2.2@2739.68,485.08 J5_U_bob_2.1@2857.8,485.08 J5_U_bob_3.3@3666.73,485.08 J5_U_bob_3.2@3784.84,485.08 J5_U_bob_3.1@3902.95,485.08 J5_U_bob_4.3@4711.89,485.08 J5_U_bob_4.2@4830,485.08 J5_U_bob_4.1@4948.11,485.08 5210,746.97 5210,2340 5090,2460 12V.1@5090,2530 5092.52,2532.52 J2.1@5092.52,2845.52 ; C7.1@4345.63,2833.74 C6.1@4555.63,2833.74 C5.1@4770.63,2833.74 5080.74,2833.74 J2.1@5092.52,2845.52 ; J2.3@5092.52,3081.74 J2.2@5092.52,2963.63 J2.1@5092.52,2845.52
AUDIO_MCLK: J1.07 J9.07 | length 933.1
  Top Layer w10: J9.07@770,2690 770,3070.31 730.03,3110.27 730.03,3506.56 745.81,3522.34 745.81,3554.84 770,3579.02 J1.07@770,3590
CAM_AF_EN: J1.29 J9.29 R12_U_low-pass-filter_6.2 | length 1823.1
  Top Layer w10: J9.29@1870,2690 1830.03,2729.97 1830.03,3506.56 1870,3546.52 J1.29@1870,3590 1870,3766.21 1880,3776.21 v1(1880,3778.11)
  Bottom Layer w10: v1(1880,3778.11) 1880.61,3777.5 R12_U_low-pass-filter_6.2@2577.5,3777.5